# Altium PCB rascal-1.2.pcbdoc (part 2 of 3)
Units mm, origin at the board's own origin, x right, y up, seen from the top; angles counter-clockwise.
Board outline 114.3 x 53.34 mm, 4 copper layers (Top Layer, Ground Plane, Power Plane, Bottom Layer); 125 components, 215 nets, 799 pads, 468 vias.
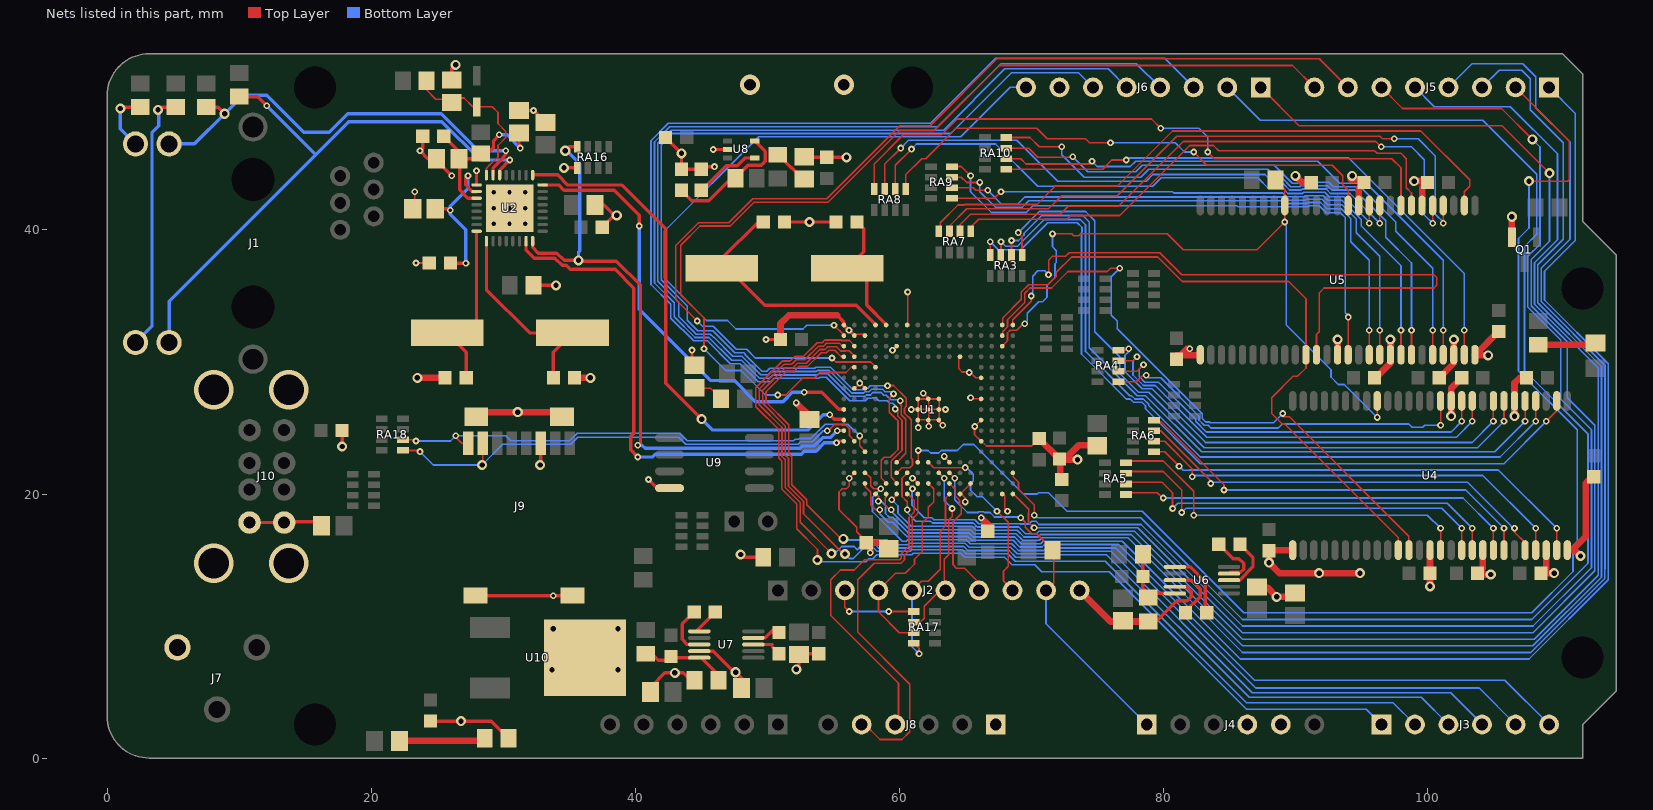
[diagram p4: the nets of this part, all layers, seen from the top]

## Via types
v1: diameter 0.508, hole 0.254, Top Layer to Bottom Layer, 360 vias
v2: diameter 0.762, hole 0.406, Top Layer to Bottom Layer, 93 vias
v3: diameter 0.66, hole 0.33, Top Layer to Bottom Layer, tented top, 9 vias
v4: diameter 3, hole 2.3, Top Layer to Bottom Layer, 4 vias
v5: diameter 1.524, hole 0.889, Top Layer to Bottom Layer, 2 vias

## Nets (pads, with @x,y where several pads share a name; then routed paths per layer and width w, separated by ;. In a path a pad name is that pad's centre, name@x,y a point inside that pad or via, vN(x,y) a via of type N, cw(c..) or ccw(c..) an arc to the next point about the centre after c; other vN are vias at no path point) (continued)
CLK: U1.B1 U4.38 U5.38 | length 51.7
  Top Layer w0.127: U1.B1@67.868,32.816 67.83,32.816 67.83,33.33 69.246,34.746 69.246,35.305 69.795,35.854 71.254,35.854 71.9,36.5 71.9,36.8 73.051,37.951 79.582,37.951 81.433,36.1 89.5,36.1 90.8,34.8 U5.38@90.8,30.55 90.8,29.55 90.165,28.915 89.815,28.915 88.2,27.3 88.2,26.1 89,25.3 89.2,25.3 97.8,16.7 U4.38@97.8,15.75
CS: R58.2 U1.B3 U4.19 U5.19 | length 52.5
  Top Layer w0.127: U1.B3@67.8,31.2 68.2,31.6 68.2,32.2 68.4,32.4 68.9,32.4 69.4,32.9 v1(69.5,32.9) ; v1@71.7,39.7 73.071,39.7 73.216,39.555 73.584,39.555 73.729,39.7 80.3,39.7 81.5,38.5 87.1,38.5 v1(89.2,40.6) U5.19@89.2,41.85 89.2,43.1 R58.2@88.5,43.8 ; v1(96.2,25.8) U4.19@96.2,27.05
  Bottom Layer w0.127: v1(69.5,32.9) 69.7,33.1 69.7,33.7 70.556,34.556 70.841,34.556 71.193,34.908 71.193,35.793 71.792,36.392 71.792,37.433 71.9,37.541 71.9,38.429 71.6,38.729 v1(71.6,39.7) ; v1(89.2,40.6) 89.3,40.5 89.3,32.8 92.7,29.4 92.7,28.859 93.259,28.3 93.7,28.3 96.029,25.971 v1@96.029,25.8
D0: RA3.8 U4.2 | length 60.8
  Top Layer w0.127: RA3.8@66.9,38.1 v1(66.9,39.1) ; v1(109,25.5) 109.8,26.3 U4.2@109.8,27.05
  Bottom Layer w0.127: v1(66.9,39.1) 67.5,38.5 69.2,38.5 71.238,40.538 73.491,40.538 73.845,40.184 73.845,39.816 73.8,39.771 73.8,30.6 77.201,27.199 77.489,27.199 77.743,26.945 78.384,26.945 78.645,26.684 78.645,26.455 82.8,22.3 105.8,22.3 v1(109,25.5)
D1: RA3.7 U4.4 | length 58.3
  Top Layer w0.127: RA3.7@67.7,38.1 v1(67.7,39.1) ; v1(108.2,25.5) 108.2,25.7 U4.4@108.2,27.05
  Bottom Layer w0.127: v1(67.7,39.1) 68.046,38.754 68.954,38.754 70.992,40.792 73.708,40.792 74.1,40.4 74.1,30.8 77.448,27.453 77.595,27.453 77.849,27.199 78.489,27.199 78.899,26.789 78.899,26.701 82.8,22.8 105.5,22.8 v1(108.2,25.5)
D2: RA3.6 U4.5 | length 56.4
  Top Layer w0.127: RA3.6@68.5,38.1 v1(68.5,39.2) ; v1(107.4,25.5) 107.4,25.7 U4.5@107.4,27.05
  Bottom Layer w0.127: v1(68.5,39.2) 69.029,39.2 69.444,39.616 69.444,39.745 70.8,41.1 73.9,41.1 74.4,40.6 74.4,31.065 78.013,27.453 78.647,27.453 82.9,23.2 105.1,23.2 v1(107.4,25.5)
D3: RA3.5 U4.7 | length 54.7
  Top Layer w0.127: v1(69,39.8) 69.3,39.5 RA3.5@69.3,38.1 ; v1(105.8,25.5) 105.8,25.7 U4.7@105.8,27.05
  Bottom Layer w0.127: v1(69,39.8) 70.6,41.4 74.1,41.4 74.8,40.7 74.8,32.3 76.7,30.4 76.7,29.125 78.118,27.707 78.893,27.707 83.1,23.5 103.8,23.5 v1(105.8,25.5)
D4: RA4.8 U4.8 | length 35.1
  Top Layer w0.127: RA4.8@76.6,30.9 v1@77.5,30.9 ; v1(105,25.5) 105,25.7 U4.8@105,27.05
  Bottom Layer w0.127: v1(77.38,31) 77.38,30.78 77.1,30.5 77.1,29.253 78.392,27.961 79.139,27.961 83.2,23.9 103.4,23.9 v1(105,25.5)
D5: RA4.7 U4.10 | length 32.7
  Top Layer w0.127: RA4.7@76.6,30.1 77.7,30.1 v1(78,30.4) ; v1(103.4,25.5) 103.4,25.7 U4.10@103.4,27.05
  Bottom Layer w0.127: v1(78,30.4) 77.7,30.1 77.7,29.012 78.498,28.215 79.386,28.215 82.194,25.406 82.194,25.4 83.294,24.3 102.2,24.3 v1(103.4,25.5)
D6: RA4.6 U4.11 | length 31.1
  Top Layer w0.127: RA4.6@76.6,29.3 78,29.3 78.437,29.737 v1@78.437,29.863 ; v1@102.6,25.7 U4.11@102.6,27.05
  Bottom Layer w0.127: v1(78.5,29.8) 78.173,29.473 78.173,28.898 78.603,28.469 79.632,28.469 82.448,25.653 82.448,25.505 83.253,24.7 101.8,24.7 v1(102.6,25.5)
D7: RA4.5 U4.13 | length 28.5
  Top Layer w0.127: RA4.5@76.6,28.5 77.956,28.5 78.456,29 v1@78.6,28.856 ; v1(101,25.2) U4.13@101,27.05
  Bottom Layer w0.127: v1(78.7,29) 78.9,28.8 79.8,28.8 82.702,25.899 82.702,25.611 83.111,25.202 83.398,25.202 83.6,25 88.7,25 89,25.3 98.6,25.3 98.845,25.055 99.656,25.055 99.8,25.2 v1(101,25.2)
D8: RA5.8 U4.42 | length 28.6
  Top Layer w0.127: RA5.8@77.2,22.5 80,22.5 82.3,20.2 v1(82.3,18.4) ; U4.42@101,15.75 v1(101,17.4)
  Bottom Layer w0.127: v1(82.3,18.4) 100,18.4 v1(101,17.4)
D9: RA5.7 U4.44 | length 30.1
  Top Layer w0.127: RA5.7@77.2,21.7 80,21.7 81.4,20.3 v1(81.4,18.6) ; U4.44@102.6,15.75 v1(102.6,17.4)
  Bottom Layer w0.127: v1(81.4,18.6) 81.721,18.921 101.079,18.921 v1(102.6,17.4)
D10: RA5.6 U4.45 | length 30.3
  Top Layer w0.127: RA5.6@77.2,20.9 79.9,20.9 80.7,20.1 v1(80.7,18.9) ; U4.45@103.4,15.75 v1(103.4,17.4)
  Bottom Layer w0.127: v1(80.7,18.9) 81.1,19.3 101.5,19.3 v1(103.4,17.4)
D11: RA5.5 U4.47 | length 30.6
  Top Layer w0.127: RA5.5@77.2,20.1 79.55,20.1 v1@79.95,19.7 ; U4.47@105,15.75 v1(105,17.4)
  Bottom Layer w0.127: v1@79.95,19.7 v1(80,19.7) 102.7,19.7 v1(105,17.4)
D12: RA6.8 U4.48 | length 31.8
  Top Layer w0.127: RA6.8@79.3,25.6 79.44,25.46 79.84,25.46 84.6,20.7 v1(84.6,20.3) ; U4.48@105.8,15.75 v1(105.8,17.4)
  Bottom Layer w0.127: v1(84.6,20.3) 102.9,20.3 v1(105.8,17.4)
D13: RA6.7 U4.50 | length 32.5
  Top Layer w0.127: RA6.7@79.3,24.8 79.8,24.8 83.6,21 v1(83.6,20.8) ; v1(106.6,17.4) 106.6,17.1 107.4,16.3 U4.50@107.4,15.75
  Bottom Layer w0.127: v1(83.6,20.8) 83.7,20.9 103.036,20.9 106.321,17.616 106.321,17.579 v1@106.5,17.4
D14: RA6.6 U4.51 | length 33.7
  Top Layer w0.127: RA6.6@79.3,24 80.1,24 82.2,21.9 v1(82.2,21.3) ; U4.51@108.2,15.75 v1(108.2,17.4)
  Bottom Layer w0.127: v1(82.2,21.3) 82.3,21.4 104.2,21.4 v1(108.2,17.4)
D15: RA6.5 U4.53 | length 34.6
  Top Layer w0.127: RA6.5@79.3,23.2 80.1,23.2 v1(81.194,22.106) ; U4.53@109.8,15.75 v1(109.8,17.4)
  Bottom Layer w0.127: v1@81.18,22.12 81.194,22.12 81.514,21.8 81.964,21.8 81.984,21.821 105.379,21.821 v1(109.8,17.4)
D16: RA7.8 U5.2 | length 47.3
  Top Layer w0.127: RA7.8@63,39.9 63,40.082 63.108,40.19 63.108,40.545 64.446,41.883 64.916,41.883 64.963,41.93 70.43,41.93 71.824,43.324 76.524,43.324 80.7,47.5 99.508,47.5 103.2,43.808 103.2,43.3 102.8,42.9 U5.2@102.8,41.85
D17: RA7.7 U5.4 | length 47.3
  Top Layer w0.127: RA7.7@63.8,39.9 63.8,40.3 65.1,41.6 71.3,41.6 72.3,42.6 76.5,42.6 81.008,47.108 96.392,47.108 96.6,46.9 v1(97.5,46.9) ; v1(101.2,40.5) U5.4@101.2,41.85
  Bottom Layer w0.127: v1(97.5,46.9) 99.3,46.9 100.6,45.6 100.6,41.2 101.2,40.6 v1(101.2,40.5)
D18: RA7.6 U5.5 | length 45.3
  Top Layer w0.127: RA7.6@64.6,39.9 64.6,40.4 65.4,41.2 72.2,41.2 72.8,41.8 76.6,41.8 81.5,46.7 96.1,46.7 v1(96.5,46.3) ; v1(100.4,40.5) U5.5@100.4,41.85
  Bottom Layer w0.127: v1(96.5,46.3) 98.8,46.3 99.773,45.327 99.773,41.127 v1(100.4,40.5)
D19: RA7.5 U5.7 | length 40
  Top Layer w0.127: RA7.5@65.4,39.9 65.4,40.2 66.008,40.808 72.708,40.808 73,41.1 76.7,41.1 82,46.4 83.8,46.4 84.2,46 96,46 96.2,45.8 98,45.8 98.4,45.4 98.4,43.2 98.8,42.8 U5.7@98.8,41.85
D20: RA8.8 U5.8 | length 48.3
  Top Layer w0.127: RA8.8@58.1,43.1 58.1,45 60.301,47.202 63.201,47.202 64.4,48.4 79.1,48.4 v1(79.8,47.7) ; v1(83.356,45.9) 83.856,45.4 97.3,45.4 98,44.7 U5.8@98,41.85
  Bottom Layer w0.127: v1(79.8,47.7) 82.7,47.7 83.356,47.044 v1(83.356,45.9)
D21: RA8.7 U5.10 | length 44.6
  Top Layer w0.127: RA8.7@58.9,43.1 58.9,45 v1(60.1,46.2) ; v1(96.4,40.5) U5.10@96.4,41.85
  Bottom Layer w0.127: v1(60.1,46.2) 60.7,46.8 68.9,46.8 72,43.7 78.7,43.7 79.2,44.2 87.7,44.2 88.4,43.5 89.073,43.5 89.553,43.021 90.447,43.021 90.525,43.098 92.331,43.098 92.662,42.767 94.133,42.767 v1(96.4,40.5)
D22: RA8.6 U5.11 | length 42.9
  Top Layer w0.127: RA8.6@59.7,43.1 59.7,44.9 v1(60.924,46.124) ; v1(95.6,40.5) U5.11@95.6,41.85
  Bottom Layer w0.127: v1(60.924,46.124) 61.308,46.508 67.292,46.508 70.5,43.3 79.2,43.3 79.844,43.944 87.156,43.944 88,43.1 89.114,43.1 89.448,42.767 90.552,42.767 90.63,42.844 92.225,42.844 92.557,42.513 93.688,42.513 95.6,40.6 v1(95.6,40.5)
D23: RA8.5 U5.13 | length 39.6
  Top Layer w0.127: RA8.5@60.5,43.1 60.5,44.2 61.7,45.4 62,45.4 64.3,47.7 70.4,47.7 71.2,46.9 74.108,46.9 74.408,46.6 v1(76,46.6) ; v1@82.25,45.95 83.3,44.9 92.8,44.9 93.6,44.1 93.6,43.414 94,43.014 U5.13@94,41.85
  Bottom Layer w0.127: v1(76,46.6) 80.9,46.6 81.6,45.9 v1(82.3,45.9)
D24: RA9.8 U5.42 | length 43
  Top Layer w0.127: RA9.8@64,44.8 64.7,44.8 v1(65.4,44.1) ; U5.42@94,30.55 v1(94,33.4)
  Bottom Layer w0.127: v1(65.4,44.1) 65.4,42.9 66.984,41.316 69.616,41.316 70.128,41.828 85.572,41.828 85.649,41.751 90.973,41.751 91.051,41.828 91.804,41.828 92.332,41.3 93.408,41.3 93.771,40.937 93.771,33.728 94,33.5 v1(94,33.4)
D25: RA9.7 U5.44 | length 43.3
  Top Layer w0.127: RA9.7@64,44 64.7,44 65.1,43.6 v1(66.1,43.6) ; U5.44@95.6,30.55 v1(95.6,32.4)
  Bottom Layer w0.127: v1(66.1,43.6) 66.1,42.9 67.3,41.7 69.3,41.7 69.8,42.2 88.937,42.2 89.132,42.005 90.868,42.005 90.945,42.082 91.91,42.082 92.392,41.6 93.467,41.6 94.2,40.867 94.2,39.1 95.6,37.7 v1(95.6,32.4)
D26: RA9.6 U5.45 | length 43.1
  Top Layer w0.127: RA9.6@64,43.2 65.6,43.2 65.8,43 v1(66.7,43) ; U5.45@96.4,30.55 v1(96.4,32.4)
  Bottom Layer w0.127: v1(66.7,43) 67.745,41.955 68.955,41.955 69.5,42.5 88.996,42.5 89.237,42.259 90.763,42.259 90.84,42.336 92.015,42.336 92.451,41.9 93.527,41.9 94.6,40.827 94.6,39.8 96.4,38 v1(96.4,32.4)
D27: RA9.5 U5.47 | length 43.6
  Top Layer w0.127: RA9.5@64,42.4 67.2,42.4 v1(67.7,42.9) ; U5.47@98,30.55 v1(98,32.4)
  Bottom Layer w0.127: v1(67.7,42.9) 80.692,42.9 80.792,42.8 89.055,42.8 89.342,42.513 90.658,42.513 90.735,42.59 92.12,42.59 92.452,42.259 93.527,42.259 95,40.786 95,40.3 98,37.3 v1(98,32.4)
D28: RA10.8 U5.48 | length 43
  Top Layer w0.127: RA10.8@68.3,47 69.9,47 70.6,46.3 v1(72.3,46.3) ; U5.48@98.8,30.55 v1(98.8,32.4)
  Bottom Layer w0.127: v1(72.3,46.3) 72.3,45.7 74,44 78.3,44 78.9,44.6 87.9,44.6 88.6,43.9 89.033,43.9 89.658,43.275 90.342,43.275 90.419,43.352 92.436,43.352 92.767,43.021 94.508,43.021 96.844,40.684 96.844,39.456 98.8,37.5 v1(98.8,32.4)
D29: RA10.7 U5.50 | length 43.3
  Top Layer w0.127: RA10.7@68.3,46.2 69.8,46.2 70.5,45.5 73.1,45.5 v1(73.136,45.536) ; U5.50@100.4,30.55 v1(100.4,32.4)
  Bottom Layer w0.127: v1(73.136,45.536) 74.271,44.4 77.9,44.4 78.4,44.9 88.392,44.9 89.763,43.529 90.237,43.529 90.314,43.606 92.541,43.606 92.872,43.275 94.925,43.275 97.6,40.6 97.6,39.9 100.4,37.1 v1(100.4,32.4)
D30: RA10.6 U5.51 | length 43.7
  Top Layer w0.127: RA10.6@68.3,45.4 69.2,45.4 69.6,45 74.4,45 v1(74.6,45.2) ; U5.51@101.2,30.55 v1(101.2,32.4)
  Bottom Layer w0.127: v1(74.6,45.2) 74.998,44.802 77.502,44.802 77.9,45.2 91.7,45.2 93.371,43.529 95.371,43.529 101.2,37.7 v1(101.2,32.4)
D31: RA10.5 U5.53 | length 44.7
  Top Layer w0.127: RA10.5@68.2,44.6 75.4,44.6 76.1,45.3 v1(77.2,45.3) ; U5.53@102.8,30.55 v1(102.8,32.4)
  Bottom Layer w0.127: v1(77.2,45.3) 77.354,45.454 94.046,45.454 102.8,36.7 v1(102.8,32.4)
DQMH1: U1.B2 U4.39 | length 47.6
  Top Layer w0.127: U1.B2@67.83,32.016 67.83,32.295 68.2,32.665 68.2,33.2 69.5,34.5 69.5,35.2 69.9,35.6 71.526,35.6 72.781,36.855 75.755,36.855 76,37.1 v1(76.7,37.1) ; v1@89.05,26.2 v1(89.05,26.1) 89.05,25.85 89.55,25.85 98.6,16.8 U4.39@98.6,15.75
  Bottom Layer w0.127: v1(76.7,37.1) 76.054,36.454 76.054,33.546 76.5,33.1 76.5,32.529 82.956,26.073 82.956,25.716 83.216,25.456 83.504,25.456 83.559,25.4 88.35,25.4 v1(89.05,26.1)
DQMH2: U1.A1 U5.39 | length 51.9
  Top Layer w0.127: U1.A1@68.6,32.8 68.6,33.2 70,34.6 v1(70,35) ; v1@71.32,36.58 71.32,37.72 71.6,38 72.588,38 72.869,38.281 79.719,38.281 81.4,36.6 100.5,36.6 100.7,36.4 100.7,35.8 100.5,35.6 92.17,35.6 91.8,35.23 91.8,32.3 91.6,32.1 U5.39@91.6,30.55 U5.39@91.6,30.482
  Bottom Layer w0.127: v1(70,35) 70.1,35.1 70.1,36.5 70.5,36.9 71.014,36.9 71.3,36.614 v1(71.3,36.6)
DRXD: J8.4 U1.L17 | length 24.6
  Top Layer w0.127: J8.4@59.944,2.54 59.944,5.656 54.8,10.8 54.8,13.5 55.547,14.248 56.6,14.248 57.362,15.01 60.029,15.01 60.141,15.121 60.141,15.477 60.73,16.067 60.73,18.226 61.138,18.634 61.138,19.508 U1.L17@60.63,20.016
DTXD: J8.5 U1.K17 | length 27
  Top Layer w0.127: J8.5@57.277,2.667 58.544,1.4 60.2,1.4 60.8,2 60.8,5.6 56.846,9.554 56.846,13.505 58.096,14.756 60.134,14.756 60.395,15.016 60.395,15.372 60.984,15.962 60.984,18.121 61.392,18.529 61.392,19.61 61.393,19.612 61.392,19.613 61.392,19.978 U1.K17@61.43,20.016
ERX0: RA16.4 U1.U11 U2.16 | length 48
  Top Layer w0.254: U2.16@32.23,39.156 32.23,38.676 32.663,38.243 34.073,38.243 34.616,37.7 v2(35.7,37.7) 35.762,37.638 38.562,37.638 40.4,35.8 40.4,23.9 v1(40.2,23.7) ; v2(34.7,46) 35,46.3 RA16.4@35.6,46.3 ; v1@55.372,24.765 55.413,24.806 55.794,24.806 55.804,24.816 U1.U11@55.83,24.816
  Bottom Layer w0.254: v2@34.8,46 35.8,45 35.8,38.4 35.7,38.3 v2(35.7,37.7) ; v1(40.2,23.7) 40.5,23.7 40.747,23.453 52.474,23.453 52.652,23.631 53.539,23.631 54.186,24.278 54.778,24.278 v1(55.3,24.8)
ERX1: U1.U12 U2.15 | length 39.3
  Top Layer w0.254: U2.15@31.73,39.156 31.73,38.47 32.338,37.862 33.916,37.862 34.459,37.319 34.759,37.319 35.062,37.015 38.485,37.015 39.9,35.6 39.9,24.618 39.65,24.368 39.65,23.35 v1(40.2,22.8) ; v1@55.245,24.016 U1.U12@55.83,24.016
  Bottom Layer w0.254: v1(40.2,22.8) 41.3,22.8 41.508,23.008 52.568,23.008 52.81,23.25 53.697,23.25 54.323,23.876 v1(55.245,23.876)
ETX0: U1.U9 U2.24 | length 34.6
  Top Layer w0.254: U2.24@32.98,43.406 34.194,43.406 34.6,43 38.4,43 40.3,41.1 v1(40.3,40.3) ; v1(52.8,27.7) 54.118,27.7 55.402,26.416 U1.U9@55.83,26.416
  Bottom Layer w0.254: v1(40.3,40.3) 40.3,34 45.7,28.6 47.5,28.6 49.108,26.992 51.192,26.992 51.9,27.7 v1(52.8,27.7)
ETX1: U1.U10 U2.25 | length 39.1
  Top Layer w0.254: U2.25@32.23,44.156 32.255,44.181 34.119,44.181 34.9,43.4 39,43.4 42.3,40.1 42.3,28.4 v2(45.033,25.667) ; v1(54.73,26) 55.076,25.654 U1.U10@55.792,25.654
  Bottom Layer w0.254: v2(45.033,25.667) 45.856,24.844 53.07,24.844 54.226,26 v1(54.73,26)
GND: C3.2 C6.2 C7.2 C8.2 C9.2 C10.2 C11.2 C12.2 C13.1 C14.1 C15.2 C16.2 C17.2 C18.2 C19.2 C20.2 C21.2 C22.2 C23.2 C24.2 C25.2 C26.2 C27.2 C28.2 C29.2 C30.2 C31.2 C34.2 C36.2 C37.2 C40.2 C42.2 C43.2 C44.2 C46.2 C47.1 C48.1 C49.1 C50.1 C51.1 C52.1 C53.1 C54.1 C55.1 C56.1 C57.1 C58.1 C59.1 C60.1 C61.2 C62.2 C65.1 J2.10 J4.4 J4.5 J6.7 J7.2 J8.1 J9.6 J9.9 J9.10 J9.11 J9.12 J10.4 J10.8 Q1.2 R53.2 R62.2 R64.2 R68.1 R78.2 RA16.5 U1.B17 U1.D6 U1.D8 U1.D10 U1.D12 U1.E16 U1.F4 U1.F17 U1.G14 U1.H8 U1.H9 U1.H10 U1.J8 U1.J9 U1.J10 U1.K8 U1.K9 U1.K10 U1.K16 U1.L1 U1.M3 U1.R2 U1.R7 U1.T2 U1.T7 U1.T15 U1.U1 U2.1 U2.33 U4.6 U4.12 U4.28 U4.41 U4.46 U4.52 U4.54 U5.6 U5.12 U5.28 U5.41 U5.46 U5.52 U5.54 U6.9 U7.9 U8.2 U9.4 U10.2 | length 216.1
  Top Layer w0.127: C10.2@23.3,41.6 v1(23.3,42.9) ; v1(23.4,37.5) C11.2@24.4,37.5 ; C44.2@45,44.6 C44.2@45.2,44.8 ; v1@45.9,46.1 v1(45.906,46.094) ; v1@56.185,21.215 v1(56.2,21.2) ; U1.T15@56.63,21.616 56.214,21.2 v1(56.2,21.2) ; U1.T7@56.63,28.016 57,28.386 v1(57,28.4) 57.046,28.4 U1.R7@57.43,28.016 ; U1.T2@56.63,32.016 56.714,32.1 57.346,32.1 U1.R2@57.43,32.016 ; C51.1@57.557,16.357 56.77,17.144 56.77,17.48 55.432,18.818 55.432,20.153 55.679,20.4 56,20.4 56.2,20.6 v1(56.2,21.2) ; v1@59.4,30.8 59.816,31.216 U1.M3@59.83,31.216 ; U1.L1@60.63,32.816 v1(60.63,35.3) ; v1(60.9,26.4) 60.916,26.416 U1.K9@61.43,26.416 ; v1@61.05,21.19 61.056,21.19 U1.K16@61.43,20.816 ; U1.K8@61.4,27.2 U1.K8@61.43,27.2 ; v1(61.43,25.03) U1.K10@61.43,25.616 ; U1.K8@61.43,27.216 U1.K8@61.43,27.2 ; v1(61.816,27.63) 62.23,27.216 U1.J8@62.23,27.2 ; v1@62.2,25.1 v1(62.23,25.13) U1.J10@62.23,25.616 ; v1(63.3,25.2) 63.03,25.47 U1.H10@63.03,25.616 ; v1(63.4,22.846) U1.G14@63.83,22.416 ; v1(63.5,26.4) 63.484,26.416 U1.H9@63.03,26.416 ; U1.F4@64.63,30.416 64.5,30.286 64.5,29.5 64.755,29.245 65.356,29.245 65.8,28.8 U1.D6@66.2,28.8 ; v1(65,19.4) 65,19.694 64.654,20.04 U1.E16@65.43,20.816 ; v1@65.4,27.216 U1.D8@66.23,27.216 ; U1.D12@66.23,24.016 U1.D12@66.216,24.016 ; U1.D10@66.23,25.616 v1(65.727,25.113) 65.7,25.086 65.7,24.5 U1.D12@66.2,24 U1.D12@66.216,24.016 ; 67.647,23.632 67.153,23.632 66.6,23.632 U1.D12@66.216,24.016 ; 67.647,23.632 67.953,23.632 68.447,23.632 ; U1.B17@67.83,20.016 67.978,19.868 67.978,18.922 v1(68.2,18.7) ; 68.447,23.632 70.032,23.632 C58.1@70.6,24.2 ; U1.K10@61.43,25.616 U1.J10@62.23,25.616 ; U1.K10@61.43,25.616 U1.K9@61.43,26.416 ; U1.K9@61.43,26.416 U1.J9@62.23,26.416 ; U1.K9@61.43,26.416 U1.K8@61.43,27.2 ; U1.K8@61.43,27.2 U1.J8@62.2,27.2 U1.J8@62.23,27.2 ; U1.J10@62.23,25.616 U1.J9@62.23,26.416 ; U1.J10@62.23,25.616 U1.H10@63.03,25.616 ; U1.J9@62.23,26.416 U1.H9@63.03,26.416 ; U1.J9@62.23,26.416 U1.J8@62.23,27.2 ; U1.J8@62.23,27.2 U1.H8@63,27.2 63.014,27.2 63.03,27.216 U1.H9@63.03,26.416 ; U1.H10@63.03,25.616 U1.H9@63.03,26.416
  Top Layer w0.254: J10.8@10.79,17.836 J10.4@13.41,17.836 13.51,17.836 13.574,17.9 15.95,17.9 C14.1@16.25,17.6 ; v2@17.8,23.5 v2(17.8,23.6) C13.1@17.8,24.8 ; C9.2@23.9,47.1 23.9,46.2 v1(23.7,46) 24.3,45.4 C8.2@24.95,45.4 ; C65.1@24.5,2.8 v2(26.8,2.8) 29.1,2.8 R78.2@30.4,1.5 ; C8.2@25.1,45.4 25,45.5 25,45.2 v1(26.1,44.1) ; C15.2@26.1,51.5 26.1,52.2 v2(26.4,52.5) ; J9.9@27.9,12.3 v1(33.8,12.3) J9.10@35.25,12.3 ; U2.1@27.98,43.406 v1(27.98,44.48) ; C3.2@31.2,49.05 v1(32.3,49.05) C12.2@33.2,48.15 ; R53.2@32.3,35.8 v2(34,35.8) ; v2@32.8,22.3 32.85,22.35 J9.6@32.85,23.85 ; v2(34.6,44.7) RA16.5@35.6,44.7 ; C6.2@36.9,41.9 37.6,41.9 38.4,41.1 C7.2@37.5,40.2 C7.2@37.3,40.2 ; v1(41,21.1) 41.653,20.447 U9.4@42.6,20.447 ; C36.2@41.2,5.4 42.25,6.45 v2(43,6.45) 43.65,6.45 44.5,5.6 R64.2@44.5,5.5 ; C42.2@42.3,47 v2(43.5,45.8) C43.2@43.5,44.6 C44.2@45,44.6 ; v1(44.3,30.9) 44.3,29.95 C52.1@44.5,29.75 ; U7.9@44.85,8.1 45.9,8.1 v2@47.55,6.45 ; C44.2@45.2,44.8 v1(46,44.8) v1@46.1,44.8 ; v1(45.906,46.094) U8.2@46.997,46.094 ; v2(47.6,6.5) 48.1,6 C37.2@48.1,5.3 ; v2(47.985,15.415) 48.2,15.2 R68.1@49.7,15.2 ; v1(49.9,31.7) C53.1@51,31.7 C53.1@51.1,31.7 ; C60.1@51.3,40.6 v2(53.2,40.6) C59.1@55.2,40.6 ; v2@52.21,6.71 52.4,6.9 52.4,7.9 C46.2@53.9,7.9 ; C55.1@52.8,45.5 54.1,45.5 55,45.5 v2(56,45.5) ; C56.1@53.2,25.6 C56.1@53.2,25.65 ; 55.3,33.528 55.8,33.028 U1.U1@55.8,32.8 v1(56.196,32.404) 56.584,32.016 U1.T2@56.63,32.016 ; C49.1@66.4,17.594 66.754,17.24 C49.1@67.025,16.968 ; R62.2@78.252,10.348 R62.2@78.852,10.348 79.452,10.348 81.012,11.909 81.825,11.909 82.125,12.209 82.125,12.609 81.76,12.974 U6.9@80.875,12.974
  Top Layer w0.508: v2(23.5,28.8) C62.2@25.6,28.8 ; J9.11@27.95,26.2 v2(31.1,26.2) J9.12@34.45,26.2 ; C61.2@35.4,28.8 v2(36.6,28.8) ; C53.1@51,31.7 51,32.9 51.628,33.528 55.3,33.528 ; v1(52.2,26.9) 53.2,25.9 C56.1@53.2,25.65 ; v1(57.8,15.54) 57.8,16 C51.1@57.5,16.3 58.75,16.3 C50.1@59.2,15.85 ; v1(66.2,18.2) 66.754,17.646 C49.1@66.754,17.24 ; C58.1@70.6,24.2 70.6,24.178 C47.1@72.131,22.646 ; C57.1@72.2,21.1 C47.1@72.2,22.571 ; v2(73.5,22.6) 72.178,22.6 C47.1@72.131,22.646 ; J2.10@73.66,12.7 76.012,10.348 R62.2@78.852,10.348 ; C48.1@75,23.5 74.8,23.7 73.6,23.7 72.546,22.646 C47.1@72.131,22.646 ; C23.2@81,30.2 81.8,31 v1(82,31) ; C23.2@81,30.5 82.75,30.5 U5.28@82.8,30.55 ; C31.2@86.987,12.909 87.887,12.909 v2(88.587,12.209) 89.723,12.209 C30.2@89.963,12.449 ; U4.28@89.8,15.75 88.05,15.75 C16.2@88,15.7 v2(88,14.8) 88.8,14 v2(94.9,14) ; v2(90,44.1) 90.5,43.6 C24.2@91.2,43.6 ; U5.41@93.2,30.55 v2(93.2,31.7) ; v2@94.2,43.8 95,43.8 C25.2@95.2,43.6 94.8,43.2 U5.12@94.8,41.85 ; C29.2@96.075,28.8 97.2,29.925 U5.46@97.2,30.55 v2(97.2,31.7) ; v2(99,43.7) 99.9,43.7 C26.2@100,43.6 99.6,43.2 U5.6@99.6,41.85 ; v2(100.2,13) C17.2@100.2,14 U4.41@100.2,15.75 ; C28.2@100.9,28.8 102,29.9 U5.52@102,30.55 v2(102,31.7) ; v2(101.8,25.9) U4.12@101.8,27.05 101.8,28 C22.2@102.6,28.8 ; U4.46@104.2,15.75 104.2,14.4 C18.2@103.8,14 103.9,13.9 v2(104.8,13.9) ; v2(104.6,30.5) 103.65,30.5 U5.54@103.6,30.55 103.65,30.55 C27.2@105.4,32.3 ; Q1.2@106.4,39.45 v2(106.4,41) ; v2(106.6,25.9) U4.6@106.6,27.05 106.6,28.4 107,28.8 C21.2@107.5,28.8 ; U4.52@109,15.75 109,14.4 C19.2@108.6,14 v2(109.6,14) ; U4.54@110.6,15.75 110.95,15.75 ; v2(111.6,15.3) 111.15,15.75 110.95,15.75 ; C20.2@112.4,21.225 112,20.825 112,16.8 110.95,15.75
  other v1: 61,21.2 65.4,27.3 65.3,29.2 59.49,30.89
  other v2: 33.7,6.7 38.7,6.7 52.2,6.719 33.8,9.8 38.7,9.8 91.8,14 32.8,22.2 38.6,41.1 94.3,44.1
  other v3: 29.28,40.456 30.48,40.456 31.68,40.456 29.28,41.656 30.48,41.656 31.68,41.656 29.28,42.856 30.48,42.856 31.68,42.856
  other v4: 8.08,14.766 13.76,14.766 8.08,27.906 13.76,27.906
  other v5: 48.7,51 55.8,51
NetC3_1: C3.1 C8.1 C9.1 L1.2 U2.3 | length 13.4
  Top Layer w0.254: C9.1@25.5,47.1 26.7,45.9 C8.1@26.7,45.4 ; U2.3@27.98,42.406 27.336,42.406 27.33,42.4 26.7,43.03 C8.1@26.7,45.4 ; v1(29.7,47.2) 29.27,46.77 29.27,46.27 28.8,45.8 L1.2@28.3,45.8 27.9,45.4 C8.1@26.7,45.4 ; C3.1@31.2,47.35 31.2,46.3 v1(31.3,46.2)
  Bottom Layer w0.254: v1(29.7,47.2) 30.3,47.2 v1(31.3,46.2)
NetC10_1: C10.1 C11.1 U2.2 | length 11.8
  Top Layer w0.254: C10.1@24.85,41.6 25.9,41.6 v1(26,41.5) ; C11.1@26,37.5 26.025,37.475 v1(27.175,37.475) ; v1(27.33,44.1) 27.155,43.925 27.155,43.406 27.655,42.906 U2.2@27.98,42.906
  Bottom Layer w0.254: v1(27.175,37.475) 27.175,40.025 26,41.2 v1(26,41.5) 26,41.8 27.33,43.13 v1(27.33,44.1)
NetC15_1: C15.1 D1.1 R50.1 U2.32 | length 12.5
  Top Layer w0.127: R50.1@24.2,51.3 24.2,50.6 24.9,49.9 26,49.9 26.1,50 27.025,50 27.7,49.325 D1.1@28,49.325 29.175,49.325 29.6,48.9 29.6,48.058 30.2,47.458 30.2,47 29.6,46.4 29.6,45.531 29.079,45.01 29.061,45.01 28.73,44.679 U2.32@28.73,44.156
NetC32_1: C32.1 U6.8 | length 4.4
  Top Layer w0.254: U6.8@80.875,13.474 82.137,13.474 82.798,12.813 82.798,12.231 81.631,11.065 C32.1@81.617,11.05
NetC32_2: C32.2 U6.6 | length 5.1
  Top Layer w0.254: U6.6@80.875,14.474 82.026,14.474 83.179,13.321 C32.2@83.179,11.009
NetC33_1: C33.1 U6.3 | length 4.4
  Top Layer w0.254: U6.3@84.975,13.474 85.785,13.474 86.787,14.476 86.787,15.213 C33.1@85.8,16.2
NetC33_2: C33.2 U6.4 | length 4.2
  Top Layer w0.254: C33.2@84.2,16.2 85.3,15.1 85.724,15.1 86.079,14.745 86.079,14.306 85.842,14.07 85.071,14.07 U6.4@84.975,13.974
NetC35_2: C35.2 R61.2 R62.1 U6.10 | length 5.2
  Top Layer w0.254: R61.2@78.452,15.448 C35.2@78.452,13.748 78.452,12.872 78.85,12.474 78.852,12.474 U6.10@80.875,12.474
NetC38_1: C38.1 U7.8 | length 3.9
  Top Layer w0.254: C38.1@44.467,11.059 43.567,10.159 43.567,8.983 43.95,8.6 U7.8@44.85,8.6
NetC38_2: C38.2 U7.6 | length 1.9
  Top Layer w0.254: U7.6@44.729,9.721 C38.2@46.067,11.059
NetC39_1: C39.1 U7.3 | length 2.2
  Top Layer w0.254: U7.3@48.95,8.6 50.4,8.6 ; 50.4,8.4 C39.1@50.9,7.9
NetC39_2: C39.2 U7.4 | length 2.2
  Top Layer w0.254: U7.4@48.95,9.1 49.85,9.1 C39.2@50.45,9.7 ; C39.2@50.45,9.5 C39.2@50.9,9.5
NetC41_2: C41.2 R63.2 R64.1 U7.10 | length 7.1
  Top Layer w0.254: R63.2@40.8,7.9 41.25,7.9 41.75,7.4 42.6,7.4 C41.2@42.8,7.6 ; C41.2@42.7,7.7 C41.2@42.8,7.6 ; U7.10@44.85,7.6 C41.2@42.8,7.6 ; U7.10@45.025,7.575 46.3,6.3 R64.1@46.3,5.9 R64.1@46.3,5.5
NetC43_1: C43.1 L5.1 U8.5 | length 10
  Top Layer w0.254: C43.1@43.5,43 44.278,42.222 45.581,42.222 46.959,43.6 47.6,43.6 L5.1@47.6,43.9 47.6,43.959 48.541,44.9 49.547,44.9 49.846,45.199 49.846,45.945 U8.5@49.047,46.744
NetC44_1: C44.1 U8.4 | length 5.3
  Top Layer w0.254: C44.1@45,43 45.326,43 45.183,43.143 46.895,44.854 47.71,44.854 48.3,45.444 U8.4@49.047,45.444
NetC52_2: C52.2 R66.2 | length 2.3
  Top Layer w0.127: C52.2@44.5,28 45.7,28 R66.2@46.5,27.2
NetC55_2: C55.2 R67.2 | length 2.6
  Top Layer w0.254: R67.2@50.8,45.7 51.8,44.7 51.85,44.7 52.6,43.95 C55.2@52.6,43.9
NetC59_2: C59.2 U1.N1 Y2.2 | length 10.3
  Top Layer w0.254: Y2.2@56.05,37.1 57.3,38.35 57.3,40.1 C59.2@56.8,40.6 ; Y2.2@58.488,37.338 57.531,37.338 57.531,37.1 57.531,34.315 59.023,32.823 U1.N1@59.03,32.816
NetC60_2: C60.2 U1.P1 Y2.1 | length 18.4
  Top Layer w0.254: Y2.1@46.2,37.9 46.775,37.325 49.8,34.3 56.746,34.3 58.223,32.823 U1.P1@58.23,32.816 ; Y2.1@46.57,37.844 49.326,40.6 C60.2@49.7,40.6
NetC61_1: C61.1 U2.9 Y1.2 | length 16.9
  Top Layer w0.254: U2.9@28.73,39.156 28.73,35.47 32,32.2 Y1.2@35.25,32.2 ; C61.1@33.8,28.8 33.8,30.75 Y1.2@35.25,32.2 ; Y1.2@36.55,32.2 Y1.2@35.25,32.2
NetC62_1: C62.1 U2.8 Y1.1 | length 12.1
  Top Layer w0.254: Y1.1@25.75,32.2 27.2,30.75 C62.1@27.2,28.8 ; Y1.1@27.05,32.2 27.98,33.13 U2.8@27.98,39.906
NetD2_2: D2.2 R78.1 | length 6.5
  Top Layer w0.508: D2.2@22.15,1.3 28.4,1.3 R78.1@28.6,1.5
NetD4_2: D4.2 R87.1 | length 4.4
  Top Layer w0.508: R87.1@108.4,31.3 112.599,31.3 D4.2@112.727,31.428
NetJ1_13: J1.13 R46.1 U2.30 | length 44.8
  Top Layer w0.254: R46.1@10,50.1 11.4,50.1 v1(12.1,49.4) ; U2.30@29.73,44.156 29.73,44.53 v1(30.5,45.3)
  Bottom Layer w0.254: J1.13@4.695,31.482 4.695,34.595 18.3,48.2 25.35,48.2 28.25,45.3 v1(30.5,45.3) ; v1(12.1,49.4) 15.794,45.706
NetJ1_14: J1.14 R43.1 | length 19.7
  Top Layer w0.254: v2@3.9,49.1 4.1,49.3 R43.1@5.2,49.3
  Bottom Layer w0.254: J1.14@2.155,31.482 3.4,32.727 3.4,47.4 3.9,47.9 v2@3.9,49.1
  other v2: 3.85,49.1
NetJ1_15: J1.15 R45.1 U2.31 | length 33.9
  Top Layer w0.254: J1.15@4.695,46.518 J1.15@4.813,46.4 ; R45.1@7.5,49.3 8.4,49.3 v2(8.9,48.8) ; U2.31@29.23,44.156 29.23,44.712 29.992,45.474 29.992,45.51 30.2,45.718 v1(30.2,46)
  Bottom Layer w0.254: J1.15@4.695,46.518 6.618,46.518 v2(8.9,48.8) 10.3,50.2 12.1,50.2 14.9,47.4 16.81,47.4 18.21,48.8 25.3,48.8 28.1,46 v1(30.2,46)
NetJ1_16: J1.16 R42.1 | length 4.7
  Top Layer w0.254: v2(1,49.2) 1.1,49.3 R42.1@2.5,49.3
  Bottom Layer w0.254: v2(1,49.2) 1,47.673 J1.16@2.155,46.518
NetJ2_3: J2.3 RA17.5 | length 6.6
  Top Layer w0.127: J2.3@55.88,12.7 55.88,11.42 v1(56.2,11.1) ; v1(59.2,11.1) RA17.5@61.1,11.1
  Bottom Layer w0.127: v1(56.2,11.1) v1(59.2,11.1)
NetJ2_5: J2.4 RA17.7 U1.J16 | length 15.4
  Top Layer w0.127: RA17.7@61.1,9.5 60,9.5 58.42,11.08 J2.4@58.42,12.7 59.714,13.994 60.45,13.994 61.157,14.7 61.157,15.057 61.746,15.646 61.746,17.805 62.2,18.259 62.2,18.989 62.6,19.389 62.6,20.4 U1.J16@62.2,20.8
  Top Layer w0.254: U1.J16@62.23,20.816 U1.J16@62.23,20.828
NetJ2_7: J2.5 RA17.8 U1.G17 | length 14.8
  Top Layer w0.127: J2.5@60.96,12.7 61.66,13.4 62.2,13.4 63.1,14.3 63.1,17.17 63.5,17.57 63.5,19.7 U1.G17@63.8,20 ; RA17.8@61.1,8.7 61.5,8.3 v1(61.5,7.9)
  Bottom Layer w0.127: J2.5@60.96,12.7 60.96,8.44 v1(61.5,7.9)
NetJ2_9: J2.6 RA17.6 U1.H15 | length 13.4
  Top Layer w0.127: RA17.6@61.1,10.3 61.6,10.3 61.9,10.6 61.9,11.5 63.1,12.7 63.4,12.7 63.4,15.051 63.754,15.405 63.754,18.054 64,18.3 v1(64,18.9) ; U1.H15@63,21.6 v1(63.4,21.2) ; U1.H15@63.03,21.616 U1.H15@63.03,21.626
  Bottom Layer w0.127: v1(63.4,21.2) 63.4,19.5 v1(64,18.9)
NetJ2_11: J2.7 U1.G16 | length 9.9
  Top Layer w0.127: U1.G16@63.8,20.8 64.232,20.368 64.232,19.847 64.555,19.524 64.555,19.216 64.7,19.071 64.7,18.5 64.062,17.862 64.062,14.678 64.209,14.531 64.209,14.488 64.321,14.377 64.941,14.377 66.04,13.277 J2.7@66.04,12.7
NetJ2_13: J2.8 U1.J14 | length 14.5
  Top Layer w0.127: U1.J14@62.2,22.4 62.6,22 v1(65,22) ; v1(67.4,18.7) 68.244,17.856 68.244,14.516 67.9,14.171 67.9,13.38 J2.8@68.58,12.7
  Bottom Layer w0.127: v1(65,22) 65.1,22 65.6,21.5 65.6,21 65.4,20.8 65.4,20.3 65.9,19.8 66.3,19.8 v1(67.4,18.7)
NetJ2_15: J2.9 J4.1 R76.2 U1.G15 | length 28.1
  Top Layer w0.127: U1.G15@63.8,21.6 v1(64.2,21.2) ; v1(69.2,18.2) 69.532,17.867 69.532,17.49 70.027,16.996 70.395,16.996 70.4,17 71.637,15.763 71.7,15.7 71.7,13.28 J2.9@71.12,12.7
  Bottom Layer w0.127: v1(64.2,21.2) 64.2,19.571 65.171,18.6 65.971,18.6 66.016,18.644 66.384,18.644 66.429,18.6 66.871,18.6 67.216,18.256 69.144,18.256 v1(69.2,18.2) ; J2.9@71.11,12.69 71.11,10.17 J4.1@78.74,2.54
NetJ3_0: J3.1 U1.T3 | length 72.4
  Top Layer w0.127: v2@53.963,15.201 53.8,15.363 53.8,15.8 52.237,17.363 52.237,19.246 51.1,20.382 51.1,22.496 50.858,22.737 50.858,24.886 49.14,26.605 49.14,28.057 51.128,30.046 51.169,30.046 51.195,30.072 51.735,30.072 52.079,30.416 52.738,30.416 53.784,31.462 53.791,31.455 54.159,31.455 54.366,31.662 55.582,31.662 55.621,31.623 56.223,31.623 U1.T3@56.63,31.216
  Bottom Layer w0.127: v2@53.8,14.865 57.465,14.865 57.695,15.095 57.984,15.095 58.289,15.4 60.942,15.4 61.058,15.516 64.664,15.516 64.964,15.215 67.964,15.215 68.533,14.646 70.254,14.646 70.8,14.1 75.9,14.1 86.3,3.7 95.36,3.7 J3.1@96.52,2.54
  other v2: 53.8,15
NetJ3_1: J3.2 U1.T4 | length 73.1
  Top Layer w0.127: v2@55.88,15.367 52.745,18.502 52.745,19.456 51.608,20.593 51.608,22.706 51.366,22.948 51.366,25.145 49.648,26.864 49.648,27.847 51.338,29.538 51.379,29.538 51.405,29.564 51.774,29.564 51.8,29.538 51.919,29.538 52.141,29.759 52.29,29.908 52.949,29.908 53.988,30.947 54.37,30.947 54.576,31.154 55.246,31.154 55.568,30.832 55.953,30.832 55.969,30.848 56.198,30.848 U1.T4@56.63,30.416
  Bottom Layer w0.127: v2(55.888,15.451) 56.22,15.119 56.521,15.119 57.387,15.984 57.984,15.984 58.315,15.654 60.837,15.654 60.953,15.77 64.769,15.77 65.069,15.469 68.21,15.469 68.779,14.9 75.6,14.9 86.3,4.2 97.4,4.2 J3.2@99.06,2.54
NetJ3_2: J3.3 U1.U3 | length 75.8
  Top Layer w0.127: v2(54.864,15.494) 52.491,17.867 52.491,19.351 51.354,20.487 51.354,22.601 51.112,22.842 51.112,25.039 49.394,26.758 49.394,27.952 51.233,29.792 51.274,29.792 51.3,29.818 51.84,29.818 51.887,29.864 52.185,30.162 52.844,30.162 53.883,31.201 54.264,31.201 54.471,31.408 55.476,31.408 55.668,31.216 U1.U3@55.83,31.216
  Bottom Layer w0.127: v2(54.864,15.494) 55.012,15.642 55.271,15.642 55.651,16.022 56.589,16.022 56.827,15.784 57.281,16.238 58.089,16.238 58.42,15.908 60.732,15.908 60.847,16.024 64.874,16.024 65.174,15.723 68.315,15.723 68.821,15.218 71.131,15.218 71.322,15.408 75.692,15.408 86.5,4.6 99.54,4.6 J3.3@101.6,2.54
NetJ3_3: J3.4 U1.U4 | length 75.7
  Top Layer w0.127: v2(55.763,16.601) 55.763,16.52 55.753,16.51 55.669,16.51 52.999,19.18 52.999,19.561 51.862,20.698 51.862,22.811 51.62,23.053 51.62,25.25 49.902,26.969 49.902,27.741 51.444,29.284 51.484,29.284 51.511,29.31 51.668,29.31 51.695,29.284 52.025,29.284 52.173,29.432 52.395,29.654 53.054,29.654 54.093,30.693 54.475,30.693 54.681,30.9 55.1,30.9 55.584,30.416 U1.U4@55.83,30.416
  Bottom Layer w0.127: v2(55.763,16.601) 55.854,16.51 59.09,16.51 59.438,16.162 60.627,16.162 60.742,16.278 64.979,16.278 65.279,15.977 68.42,15.977 68.926,15.472 71.026,15.472 71.217,15.662 76.038,15.662 86.746,4.954 101.769,4.954 J3.4@104.161,2.561
NetJ3_4: J3.5 U1.R15 | length 59.9
  Top Layer w0.127: U1.R15@57.43,21.616 57.434,21.616 57.828,21.223 57.828,20.631 58.058,20.4 v1(58.6,20.4)
  Bottom Layer w0.127: v1@58.605,20.395 57.975,19.766 57.975,18.675 60.235,16.416 60.521,16.416 60.637,16.532 65.085,16.532 65.385,16.231 68.526,16.231 69.031,15.726 70.921,15.726 71.111,15.916 76.384,15.916 87,5.3 103.92,5.3 J3.5@106.68,2.54 J3.5@106.469,2.54
NetJ3_5: J3.6 U1.R16 | length 61
  Top Layer w0.127: U1.R16@57.43,20.816 57.43,20.537 57.832,20.135 57.832,19.178 58.21,18.8 v1(58.51,18.8)
  Bottom Layer w0.127: v1(58.51,18.8) 58.51,18.5 59.158,17.852 59.493,17.852 60.429,16.916 60.452,16.916 60.583,16.786 65.19,16.786 65.49,16.485 68.631,16.485 69.137,15.98 70.816,15.98 71.006,16.17 76.63,16.17 86.9,5.9 105.86,5.9 ; 105.9,5.9 105.86,5.9 ; J3.6@109.22,3.069 J3.6@109.22,2.54 105.86,5.9
NetJ5_0: J5.1 U1.P17 | length 105
  Top Layer w0.127: U1.P17@58.23,20.016 58.42,19.826 v1(58.42,19.452)
  Bottom Layer w0.127: v1(58.42,19.452) 58.633,19.452 59.002,19.083 59.002,19.03 58.955,18.984 58.955,18.526 59.251,18.23 59.497,18.23 60.557,17.17 60.688,17.04 65.295,17.04 65.595,16.739 68.736,16.739 69.242,16.234 70.711,16.234 70.901,16.424 76.894,16.424 85.818,7.5 107.7,7.5 113.695,13.495 113.695,14.231 113.7,14.236 113.7,29.864 108.874,34.69 108.874,36.874 111.2,39.2 111.2,48.82 J5.1@109.22,50.8
NetJ5_1: J5.2 U1.K14 | length 101.1
  Top Layer w0.127: U1.K14@61.43,22.416 v1(61.43,23.3) ; J5.2@106.68,50.8 110.744,46.736 110.744,43.815 110.629,43.7 v2(107.7,43.7)
  Bottom Layer w0.127: v1(61.43,23.3) 62.173,23.3 62.373,23.1 63,23.1 63.191,23.291 64.391,23.291 64.856,23.755 65.644,23.755 69.4,20 70.448,20 70.541,20.094 71.306,20.094 72.7,18.7 78.4,18.7 86.1,11 107.9,11 111.028,14.128 111.028,15.537 111.339,15.847 111.339,24.861 106.9,29.3 106.9,39.35 107.7,40.15 v2(107.7,43.7)
NetJ5_2: J5.3 U1.M17 | length 107.6
  Top Layer w0.127: v1(59.436,19.558) 59.83,19.952 U1.M17@59.83,20.016
  Bottom Layer w0.127: v1(59.436,19.558) 59.9,19.094 59.9,18.546 60.898,17.548 65.505,17.548 65.805,17.247 68.946,17.247 69.452,16.742 70.5,16.742 70.691,16.932 77.568,16.932 86,8.5 107.982,8.5 113.187,13.706 113.187,14.441 113.192,14.446 113.192,29.654 108.366,34.48 108.366,37.366 110.3,39.3 110.3,46.6 107.8,49.1 107.8,51.458 107.158,52.1 105.44,52.1 J5.3@104.14,50.8
NetJ5_3: J5.4 U1.N17 | length 112.2
  Top Layer w0.127: U1.N17@59.03,20.016 59.03,19.808 58.928,19.706 58.928,19.159 v1@59.423,18.663
  Bottom Layer w0.127: v1@59.423,18.663 59.576,18.511 60.793,17.294 65.4,17.294 65.7,16.993 68.841,16.993 69.347,16.488 70.605,16.488 70.796,16.678 77.322,16.678 86,8 107.841,8 113.441,13.601 113.441,14.336 113.446,14.341 113.446,29.759 108.62,34.585 108.62,37.12 110.8,39.3 110.8,46.658 108.204,49.254 108.204,51.596 107.222,52.578 103.378,52.578 J5.4@101.6,50.8
  other v1: 59.4,18.8
NetJ5_4: J5.5 U1.L15 | length 109.4
  Top Layer w0.127: v1(60.6,18.8) 60.6,19.41 60.2,19.81 60.2,21.186 U1.L15@60.63,21.616
  Bottom Layer w0.127: v1(60.6,18.8) 60.6,18.6 61.255,17.945 62.367,17.945 62.511,17.802 65.611,17.802 65.911,17.501 69.052,17.501 69.558,16.996 70.395,16.996 70.585,17.186 77.814,17.186 86,9 108.1,9 112.933,13.833 112.933,14.547 112.938,14.551 112.938,29.549 108.112,34.375 108.112,37.512 109.855,39.255 109.855,45.766 106.282,49.34 100.52,49.34 J5.5@99.06,50.8
NetJ5_5: J5.6 U1.L16 | length 107.2
  Top Layer w0.127: U1.L16@60.63,20.816 60.63,20.798 60.96,20.468 v1@60.964,20.472 ; J5.6@96.52,50.8 98.12,49.2 105.613,49.2 v2(107.95,46.863)
  Bottom Layer w0.127: v1@60.964,20.472 60.96,20.468 60.96,19.14 61.901,18.199 62.472,18.199 62.616,18.056 65.716,18.056 66.016,17.755 69.157,17.755 69.182,17.73 69.83,17.73 70.024,17.924 70.356,17.924 70.586,17.694 78.306,17.694 86,10 108,10 112.425,14.425 112.425,24.875 110.1,27.2 110.1,31.668 107.604,34.164 107.604,38.004 108.526,38.925 108.526,46.287 v2(107.95,46.863)
  other v1: 61,20.4
NetJ5_6: J5.7 U1.P5 | length 79.1
  Top Layer w0.127: v1(44.7,33.1) 43.065,34.735 43.065,38.824 44.795,40.554 47.095,40.554 48.895,42.354 54.495,42.354 60.041,47.9 62.341,47.9 67.4,52.959 91.821,52.959 ; v1(54.9,30.3) 55.2,30 57.846,30 58.223,29.623 U1.P5@58.23,29.616 ; 91.891,52.959 91.821,52.959 ; J5.7@93.98,50.8 91.821,52.959
  Bottom Layer w0.127: v1(44.7,33.1) 45.1,32.7 45.9,32.7 47.648,30.952 48.448,30.952 49.1,30.3 v1(54.9,30.3)
NetJ5_7: J5.8 U1.T5 | length 76.6
  Top Layer w0.127: v1(45.212,31.009) 45.212,33.335 43.446,35.101 43.446,38.846 44.9,40.3 47.2,40.3 49,42.1 54.6,42.1 60.019,47.519 62.619,47.519 67.551,52.451 89.789,52.451 J5.8@91.44,50.8 ; v1(50.8,27.5) 51.4,27.5 52.666,28.765 53.554,28.765 53.988,29.2 55.96,29.2 56.376,29.616 56.6,29.616 U1.T5@56.63,29.616
  Bottom Layer w0.127: v1(45.212,31.009) 46.863,29.358 48.006,29.358 49.864,27.5 v1(50.8,27.5)
NetJ6_8: J6.1 U1.A17 | length 108.2
  Top Layer w0.127: U1.A17@68.63,20.016 69.8,18.846 69.8,18.598 69.787,18.584 69.787,17.865 v1(70.211,17.44) ; J6.1@87.376,50.8 90.276,47.9 105.65,47.9 v2(109.25,44.3)
  Bottom Layer w0.127: v1(70.211,17.44) 78.06,17.44 86,9.5 108,9.5 112.679,14.179 112.679,25.212 110.6,27.292 110.6,31.528 107.858,34.27 107.858,37.758 109.25,39.15 v2(109.25,44.3)
NetJ6_9: J6.2 U1.A15 | length 108.9
  Top Layer w0.127: U1.A15@68.63,21.616 68.63,21.291 69.03,20.891 69.03,20.37 70.231,19.169 v1(70.231,18.4)
  Bottom Layer w0.127: v1(70.231,18.4) 70.239,18.4 70.439,18.2 78.3,18.2 86,10.5 107.9,10.5 112.171,14.771 112.171,24.529 107.35,29.35 107.35,38.75 108.272,39.672 108.272,44.231 104.203,48.3 87.336,48.3 J6.2@84.836,50.8
NetJ6_10: J6.3 U1.M16 | length 85.6
  Top Layer w0.127: v1(59.69,26.437) 59.69,26.444 59.75,26.504 59.892,26.362 59.892,25.904 59.944,25.852 60.2,25.596 60.2,23.307 59.661,22.768 59.647,22.768 59.381,22.502 59.381,21.265 U1.M16@59.83,20.816
  Bottom Layer w0.127: v1@59.686,26.441 59.686,26.695 59.499,26.882 59.274,26.882 59.083,27.072 58.454,27.072 58.226,27.3 57.978,27.3 57.922,27.244 57.616,27.244 57.443,27.072 56.25,27.072 54.48,28.842 53.989,28.842 53.913,28.765 50.517,28.765 50.257,28.506 49.311,28.506 47.94,29.877 47.196,29.877 45.473,31.6 44.422,31.6 42.699,33.323 42.699,34.374 41.2,35.873 41.2,46.768 42.502,48.07 62.37,48.07 67.3,53 80.096,53 J6.3@82.296,50.8
NetJ6_11: J6.4 U1.M14 | length 80.9
  Top Layer w0.127: U1.M14@59.83,22.416 60.5,23.086 60.5,25.655 60.198,25.957 60.146,26.009 60.146,26.611 60.198,26.663 60.198,26.691 59.944,26.945 v1(60.071,27.072)
  Bottom Layer w0.127: v1(60.071,27.072) 60.008,27.136 59.379,27.136 59.023,27.491 58.816,27.491 58.626,27.682 58,27.682 57.817,27.498 57.511,27.498 57.404,27.392 56.29,27.392 54.585,29.096 53.884,29.096 53.808,29.019 50.411,29.019 50.152,28.76 49.416,28.76 48.045,30.131 47.301,30.131 45.578,31.854 44.528,31.854 42.953,33.429 42.953,34.479 41.454,35.978 41.454,46.663 42.607,47.816 62.916,47.816 67.7,52.6 77.956,52.6 J6.4@79.756,50.8
NetJ6_12: J6.5 U1.N16 | length 79.5
  Top Layer w0.127: U1.N16@59.03,20.816 58.632,21.214 58.632,22.553 58.863,22.784 59.304,22.784 59.542,23.022 59.556,23.022 59.9,23.366 59.9,25.537 59.69,25.747 ; v1(59.563,27.58) 59.245,27.263 59.245,26.191 59.69,25.747
  Bottom Layer w0.127: v1(59.563,27.58) 59.398,27.745 58.922,27.745 58.731,27.936 57.895,27.936 57.712,27.752 57.405,27.752 57.299,27.646 56.395,27.646 54.691,29.35 53.779,29.35 53.702,29.273 50.306,29.273 50.073,29.041 49.495,29.041 48.091,30.444 47.384,30.444 45.965,31.863 45.928,31.863 45.683,32.108 44.633,32.108 43.3,33.441 43.3,34.514 43.127,34.687 43.127,34.701 41.708,36.12 41.708,46.558 42.712,47.562 63.362,47.562 68,52.2 75.816,52.2 J6.5@77.216,50.8
NetJ6_13: J6.6 U1.M15 | length 75.9
  Top Layer w0.127: v1@59.055,28.215 59.563,28.215 60.515,27.263 60.515,26.644 60.456,26.584 60.456,26.561 60.4,26.506 60.4,26.114 60.9,25.614 60.9,22.7 61.008,22.592 61.008,22.198 60.801,21.992 60.206,21.992 U1.M15@59.83,21.616
  Bottom Layer w0.127: v1(59.106,28.19) 57.79,28.19 57.606,28.006 57.3,28.006 57.194,27.9 56.5,27.9 54.796,29.604 53.674,29.604 53.597,29.527 50.201,29.527 49.968,29.295 49.6,29.295 48.345,30.549 48.345,30.586 48.234,30.698 47.543,30.698 45.879,32.362 44.738,32.362 43.95,33.15 43.95,34.238 41.962,36.226 41.962,46.452 42.818,47.308 63.908,47.308 68.5,51.9 73.576,51.9 J6.6@74.676,50.8
NetJ6_15: J6.8 U1.U2 | length 51.1
  Top Layer w0.127: v1(55.059,32.787) 55.823,32.023 U1.U2@55.83,32.016
  Bottom Layer w0.127: v1(55.059,32.787) 52.992,32.787 52.705,32.5 47.637,32.5 46.99,33.147 45.4,33.147 42.216,36.331 42.216,39.916 49.354,47.054 64.654,47.054 68.4,50.8 J6.8@69.596,50.8
NetJ9_1: J9.1 RA18.6 U1.R13 | length 38.9
  Top Layer w0.127: RA18.6@22.4,24.1 23.313,24.1 v1(23.4,24.013) ; v1(26.4,24.413) 26.4,24.3 26.85,23.85 J9.1@27.35,23.85 ; v1(57,24.4) 57,23.646 U1.R13@57.43,23.216
  Bottom Layer w0.127: v1(23.4,24.013) 26.013,24.013 26.4,24.4 30.2,24.4 30.576,24.024 35.023,24.024 35.599,24.6 43.367,24.6 43.943,24.024 51.991,24.024 52.113,24.146 52.359,24.146 52.416,24.202 53.302,24.202 54.394,25.294 56.106,25.294 v1(57,24.4)
NetJ9_2: J9.2 RA18.5 U1.T12 | length 38.5
  Top Layer w0.127: RA18.5@22.4,23.3 23.613,23.3 v1(23.7,23.213) ; v2@28.45,22.45 J9.2@28.45,23.85 ; v1@54.61,24.786 55.069,25.245 55.635,25.245 55.647,25.232 55.942,25.232 56.232,24.942 56.232,24.414 U1.T12@56.63,24.016
  Bottom Layer w0.127: v1(23.7,23.213) 24.713,22.2 v2(28.4,22.2) 29.97,23.77 35.128,23.77 35.658,24.3 43.308,24.3 43.838,23.77 52.342,23.77 52.464,23.892 52.521,23.948 53.408,23.948 54.245,24.786 v1(54.534,24.786)